# Altium PCB ShutdownBoard.PcbDoc (part 1 of 2)
Units mil, origin at the board's own origin, x right, y up, seen from the top; angles counter-clockwise.
Board outline 4429.13 x 4429.13 mil, 2 copper layers (Top Layer, Bottom Layer), stack 61.8 mil thick; 127 components, 112 nets, 478 pads, 128 vias.
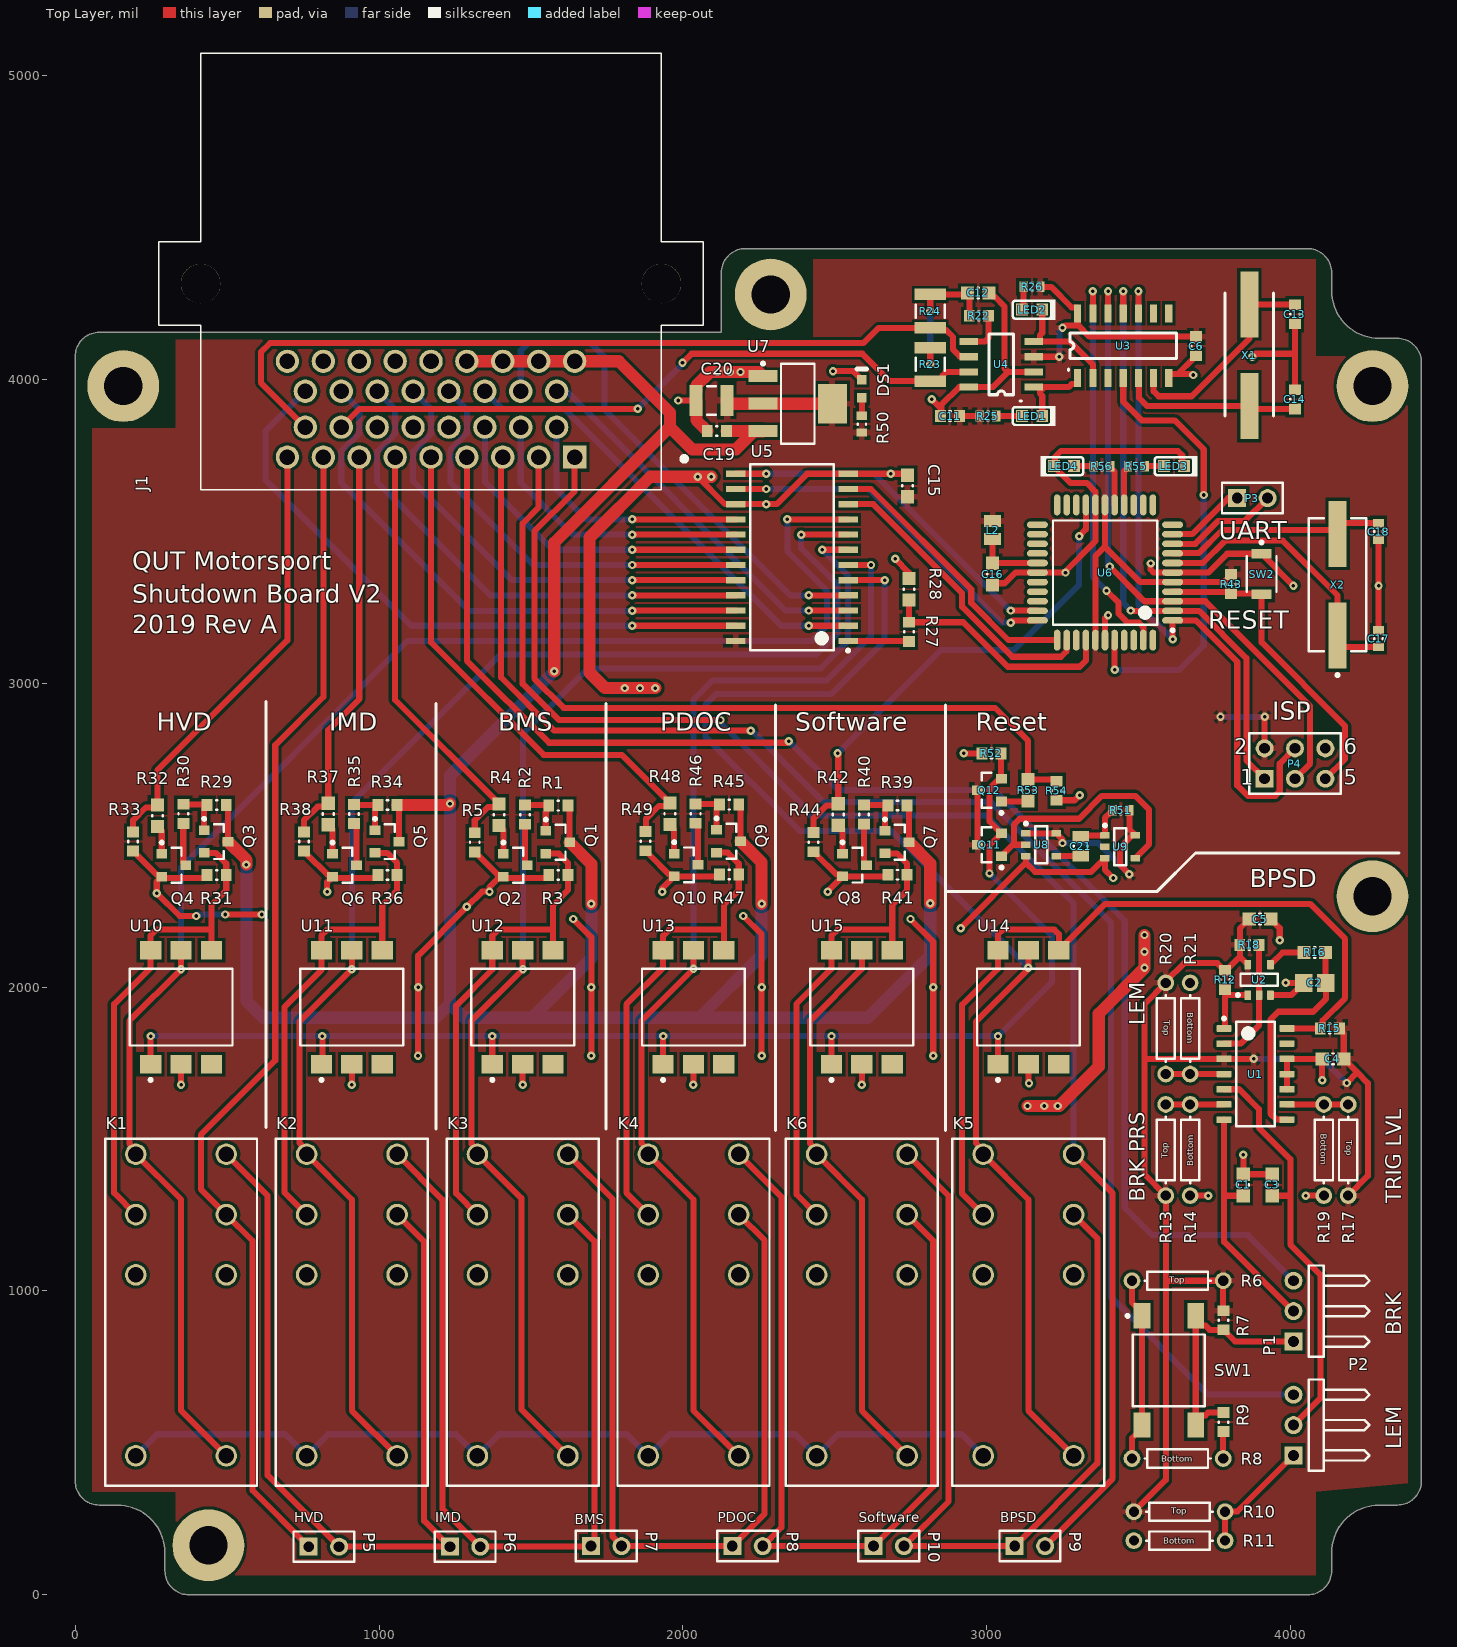
[diagram p0: Top Layer view]
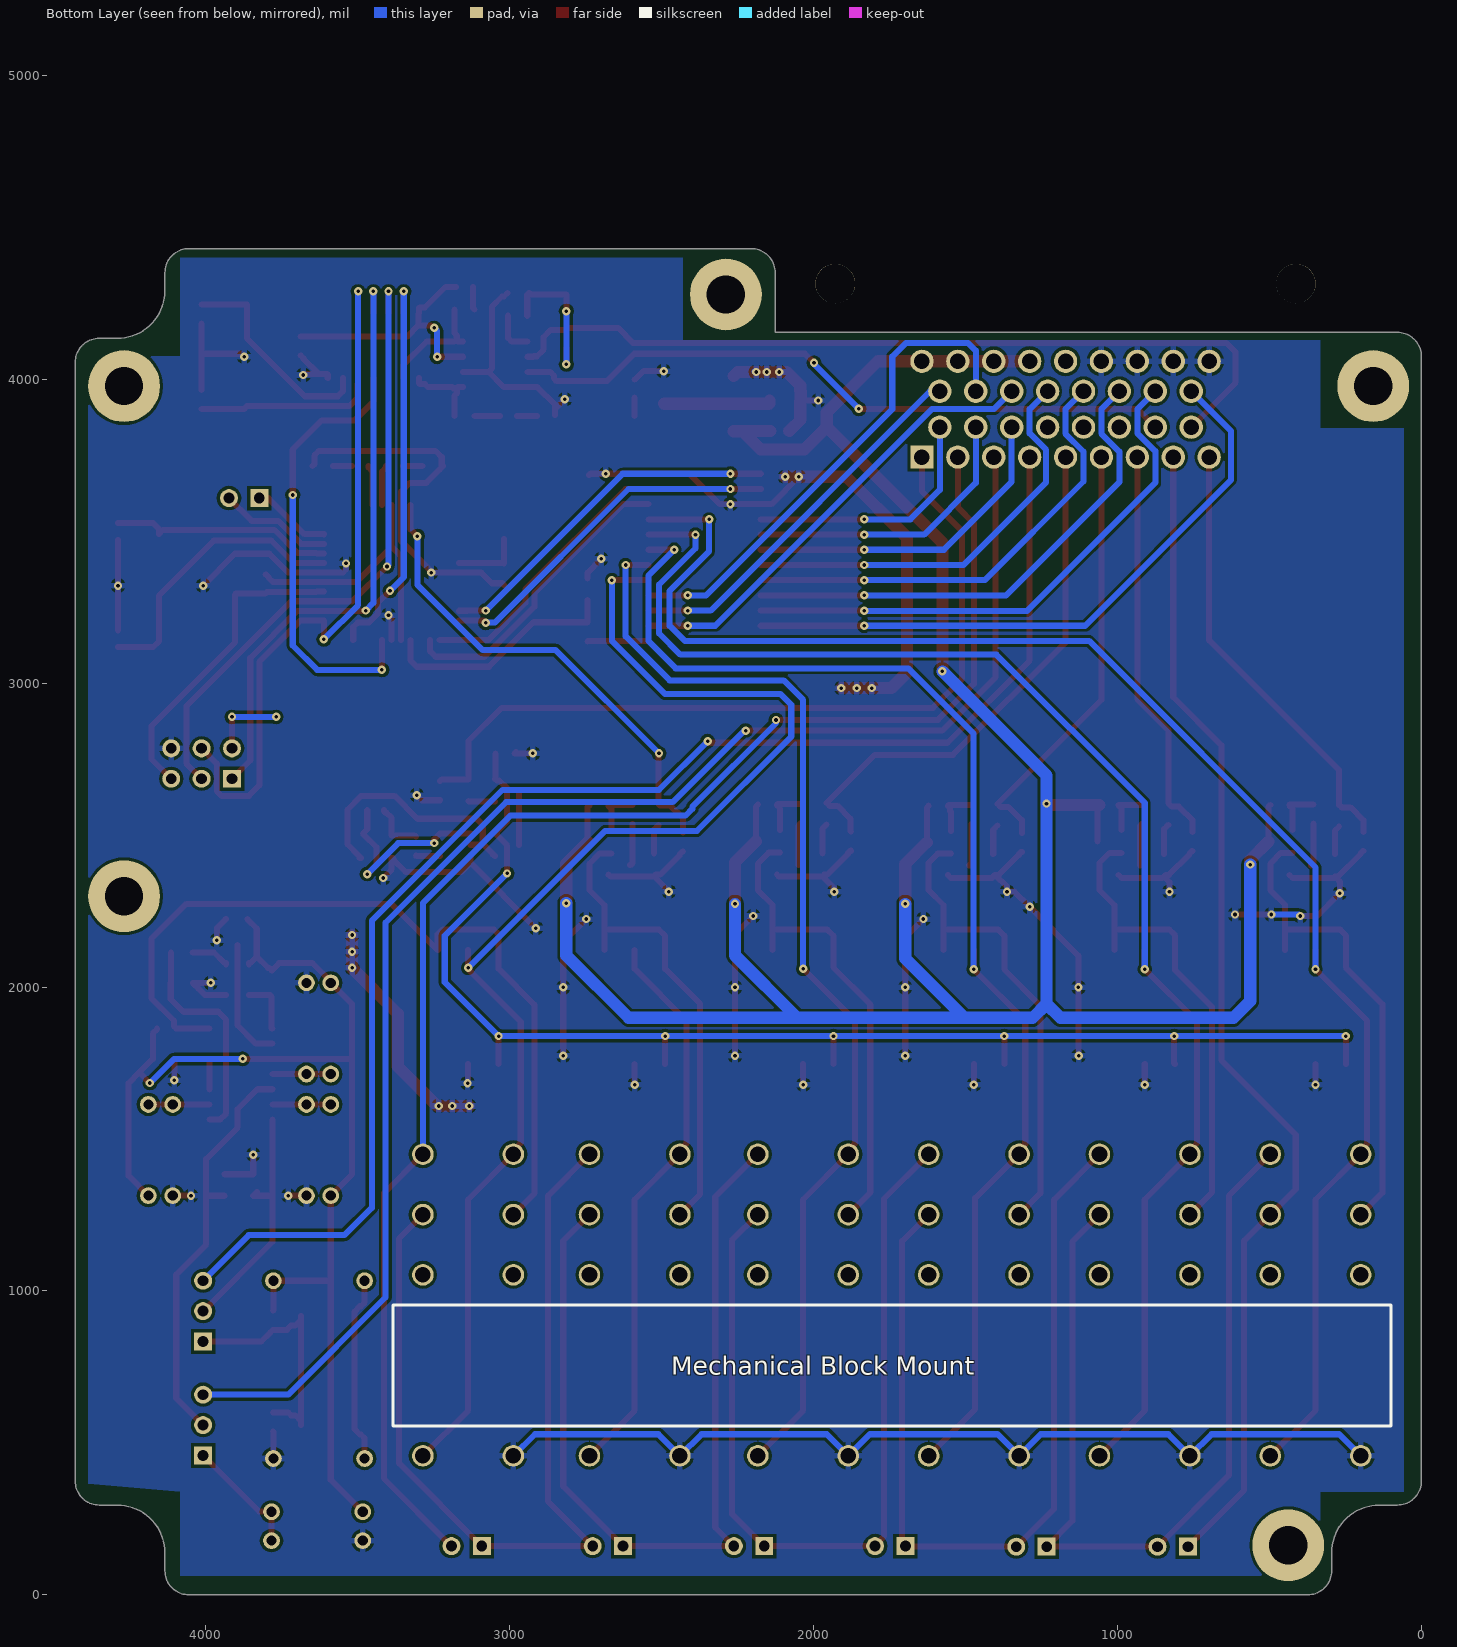
[diagram p1: Bottom Layer view, seen from below]

## Layer stack, top to bottom
Top Solder: solder mask 0.4, Solder Resist, Dk 3.5
Top Layer: signal copper 1.4
Dielectric 1: core 59, Core-043, Dk 4.3
Bottom Layer: signal copper 1.4
Bottom Solder: solder mask 0.4, Solder Resist, Dk 3.5

## Board outline
138.05,295.53 cw(c138.05,138.05) 295.53,138.05 295.53,78.99 ccw(c374.27,78.99) 374.27,0.25 4055.37,0.25 ccw(c4055.37,78.99) 4134.11,78.99 4134.11,138.05 cw(c4291.59,138.05) 4291.59,295.53 4350.64,295.53 ccw(c4350.64,374.27) 4429.38,374.27 4429.38,4055.37 ccw(c4350.64,4055.37) 4350.64,4134.11 4291.59,4134.11 cw(c4291.59,4291.59) 4134.11,4291.59 4134.11,4350.64 ccw(c4055.37,4350.64) 4055.37,4429.38 2204.97,4429.38 ccw(c2204.97,4350.64) 2126.23,4350.64 2126.23,4153.79 78.99,4153.79 ccw(c78.99,4075.05) 0.25,4075.05 0.25,374.27 ccw(c78.99,374.27) 78.99,295.53

## Design rules (kind name [scope] priority, off if disabled: settings)
Clearance [All] p1: gap=10 ignorepadtopadclearanceinfootprint=FALSE except(0: Arc-Hole Track-Hole SMDPad-Hole THPad-Hole Via-Hole Fill-Hole Poly-Hole Region-Hole Text-Hole; 6: Arc-SMDPad Arc-THPad Arc-Via Track-SMDPad Track-THPad Track-Via SMDPad-SMDPad)
PolygonConnect [All] p1: connectstyle=Relief reliefconductorwidth=20 reliefentries=4 polygonreliefangle="90 Angle" airgapwidth=10
RoutingVias [All] p1: holewidth=11.81 width=27.56 viastyle="Through Hole" minholewidth=11.81 minwidth=27.56 maxholewidth=11.81 maxwidth=27.56
SolderMaskExpansion [All] p1: expansion=4
Width [All] p1: maxlimit=40 minlimit=10 preferedwidth=20 minimp=50.000000 maximp=50.000000 favimp=50.000000
30 further rules are at their usual default settings.

## Classes and differential pairs
component class Shutdown: C21 K1 K2 K3 K4 K5 K6 P5 P6 P7 P8 P9 P10 Q11 Q12 R51 R52 R53 R54 U8 U9 U10 U11 U12 U13 U14 U15
component class Power: C19 C20 DS1 R50 U7
component class PDOC_Filtering: Q9 Q10 R45 R46 R47 R48 R49
component class Microcontroller: C16 C17 C18 L2 LED3 LED4 P3 P4 Q7 Q8 R39 R40 R41 R42 R43 R44 R55 R56 SW2 U6 X2
component class IMD_Filtering: Q5 Q6 R34 R35 R36 R37 R38
component class HVD_Filtering: Q3 Q4 R29 R30 R31 R32 R33
component class Demux: C15 R27 R28 U5
component class Connector: J1
component class CANBUS: C6 C11 C12 C13 C14 LED1 LED2 R22 R23 R24 R25 R26 U3 U4 X1
component class BPSD_Simulation: P1 P2 R6 R7 R8 R9 R10 R11 SW1
component class BPSD_Filtering: C1 C2 C3 C4 C5 R12 R13 R14 R15 R16 R17 R18 R19 R20 R21 U1 U2
component class BMS_Filtering: Q1 Q2 R1 R2 R3 R4 R5

## Components (designator, comment, footprint, x,y, rotation, side; value= is the part's Value field where it differs from the comment)
C1 "CAP 100nF 16V 0603(1608)" CAPC0603(1608)100_M 3843.5,1348.6 r270 top value=100nF
C2 "EMK212BJ106KG-T" CAPC2013X135X50ML10T25 4078.5,2013.6 r0 top
C3 "CAP 100nF 16V 0603(1608)" CAPC0603(1608)100_M 3938.5,1348.6 r270 top value=100nF
C4 "CAP 100nF 16V 0603(1608)" CAPC0603(1608)100_M 4138.5,1763.6 r0 top value=100nF
C5 "CAP 100nF 16V 0603(1608)" CAPC0603(1608)100_M 3898.5,2223.6 r0 top value=100nF
C6 "CAP 100nF 16V 0603(1608)" CAPC0603(1608)100_N 3688.5,4108.6 r90 top value=100nF
C11 "CAP 100nF 16V 0603(1608)" CAPC0603(1608)100_N 2878.5,3878.6 r0 top value=100nF
C12 "CAP 4.7nF 50V 0603(1608)" CAPC0603(1608)100_M 2971.45,4283.6 r180 top value=4.7nF
C13 "CAP 22pF 16V 0603(1608)" CAPC0603(1608)100_N 4013.5,4213.6 r90 top value=22pF
C14 "CAP 22pF 16V 0603(1608)" CAPC0603(1608)100_N 4013.5,3933.6 r90 top value=22pF
C15 "CAP 100nF 16V 0603(1608)" CAPC0603(1608)100_M 2738.5,3648.6 r270 top value=100nF
C16 "CAP 100nF 16V 0603(1608)" CAPC0603(1608)100_M 3018.5,3358.6 r90 top value=100nF
C17 "CAP 22pF 16V 0603(1608)" CAPC0603(1608)100_L 4288.5,3146.16 r270 top value=22pF
C18 "CAP 22pF 16V 0603(1608)" CAPC0603(1608)100_L 4288.5,3498.6 r90 top value=22pF
C19 "CAP 100nF 25V 0603(1608)" CAPC0603(1608)100_N 2111.3,3829.23 r0 top value=100nF
C20 "12103D106KAT2A" CAPC3225X279X50LL20T25 2093.5,3929.67 r0 top
C21 "CAP 10uF 16V 0805(2012)" CAPC0805(2012)100_L 3308.5,2463.6 r90 top value=10uF
DS1 "LTST-C191KGKT" LITE-ON-LTST-C191KRKT-2_V 2588.5,3968.6 r90 top
J1 "6437288-2" TE_6437288-2 1170.94,3901.12 r180 top
K1 "RT424024" TECO-RT424024_V 348.5,953.6 r90 top
K2 "RT424024" TECO-RT424024_V 910.5,953.6 r90 top
K3 "RT424024" TECO-RT424024_V 1472.5,953.6 r90 top
K4 "RT424024" TECO-RT424024_V 2034.5,953.6 r90 top
K5 "RT424024" TECO-RT424024_V 3136.5,953.6 r90 top
K6 "RT424024" TECO-RT424024_V 2588.5,953.6 r90 top
L2 "LQM21FN100M70L" MURA-IND0805_L 3018.54,3503.6 r90 top
LED1 "2V 20mA 0603 Org" KING-LED0603-25-ORANGE_V 3148.5,3878.6 r180 top
LED2 "2V 20mA 0603 Org" KING-LED0603-25-ORANGE_V 3148.5,4228.6 r180 top
LED3 "2V 20mA 0603 Org" KING-LED0603-25-ORANGE_V 3615.31,3713.6 r180 top
LED4 "2V 20mA 0603 Org" KING-LED0603-25-ORANGE_V 3253.5,3713.61 r0 top
P1 "Header 3H" HDR1X3H 4008.5,833.6 r90 top
P2 "Header 3H" HDR1X3H 4008.5,458.6 r90 top
P3 "UART Header" HDR1X2 3823.5,3608.6 r0 top
P4 "Header 3X2" HDR2X3 3913.5,2685.2 r0 top
P5 "Header 2" HDR1X2 768.5,158.6 r0 top
P6 "Header 2" HDR1X2 1233.09,158.6 r0 top
P7 "Header 2" HDR1X2 1697.68,160.43 r0 top
P8 "Header 2" HDR1X2 2162.26,160.43 r0 top
P9 "Header 2" HDR1X2 3091.44,160.43 r0 top
P10 "Header 2" HDR1X2 2626.85,160.43 r0 top
Q1 "NTR1P02T1G" ONSC-SOT-23-3-318-08_V 1587.86,2476.01 r0 top
Q2 "MGSF1N02LT1G" ONSC-SOT-23-3-318-08_V 1448.33,2400.49 r0 top
Q3 "NTR1P02T1G" ONSC-SOT-23-3-318-08_V 463.86,2478.6 r0 top
Q4 "MGSF1N02LT1G" ONSC-SOT-23-3-318-08_V 324.33,2400.49 r0 top
Q5 "NTR1P02T1G" ONSC-SOT-23-3-318-08_V 1025.86,2478.6 r0 top
Q6 "MGSF1N02LT1G" ONSC-SOT-23-3-318-08_V 886.33,2400.49 r0 top
Q7 "NTR1P02T1G" ONSC-SOT-23-3-318-08_V 2703.86,2476.79 r0 top
Q8 "MGSF1N02LT1G" ONSC-SOT-23-3-318-08_V 2564.33,2401.28 r0 top
Q9 "NTR1P02T1G" ONSC-SOT-23-3-318-08_V 2149.86,2479.79 r0 top
Q10 "MGSF1N02LT1G" ONSC-SOT-23-3-318-08_V 2010.33,2401.68 r0 top
Q11 "MGSF1N02LT1G" ONSC-SOT-23-3-318-08_V 3008.5,2467.98 r180 top
Q12 "MGSF1N02LT1G" ONSC-SOT-23-3-318-08_V 3008.23,2647.8 r180 top
R1 "10K 5% 0603(1608)" RESC0603(1608)_N 1589.82,2596.44 r0 top value="10000.00 Ohm"
R2 "4K7 5% 0603(1608)" RESC0603(1608)_N 1479.82,2566.91 r90 top value="4700.00 Ohm"
R3 "10K 5% 0603(1608)" RESC0603(1608)_N 1589.82,2368.6 r0 top value="10000.00 Ohm"
R4 "220R 5% 0603(1608)" RESC0603(1608)_M 1394.82,2566.91 r270 top value="220.00 Ohm"
R5 "10K 5% 0603(1608)" RESC0603(1608)_N 1314.82,2476.01 r90 top value="10000.00 Ohm"
R6 "Res1" AXIAL-0.3 3627.28,1033.6 r0 top value=1K
R7 "4K7 5% 0603(1608)" RESC0603(1608)_N 3778.5,903.6 r90 top value="4700.00 Ohm"
R8 "Res1" AXIAL-0.3 3627.28,448.6 r180 top value=1K
R9 "4K7 5% 0603(1608)" RESC0603(1608)_N 3778.5,568.6 r90 top value="4700.00 Ohm"
R10 "Res1" AXIAL-0.3 3633.5,273.6 r180 top value=1K
R11 "Res1" AXIAL-0.3 3633.5,178.6 r0 top value=1K
R12 "4K7 5% 0603(1608)" RESC0603(1608)_N 3783.5,2023.6 r90 top value="4700.00 Ohm"
R13 "Res1" AXIAL-0.3 3588.5,1463.6 r90 top value=1K
R14 "Res1" AXIAL-0.3 3668.5,1463.6 r270 top value=1K
R15 "4K7 5% 0603(1608)" RESC0603(1608)_N 4128.5,1863.6 r0 top value="4700.00 Ohm"
R16 "51K 5% 0603(1608)" RESC0603(1608)_M 4078.5,2113.6 r0 top value="51000.00 Ohm"
R17 "Res1" AXIAL-0.3 4188.5,1463.6 r270 top value=1K
R18 "4K7 5% 0603(1608)" RESC0603(1608)_N 3863.5,2138.6 r180 top value="4700.00 Ohm"
R19 "Res1" AXIAL-0.3 4108.5,1463.6 r90 top value=1K
R20 "Res1" AXIAL-0.3 3588.5,1863.6 r90 top value=1K
R21 "Res1" AXIAL-0.3 3668.5,1863.6 r270 top value=1K
R22 "300R 5% 0603(1608)" RESC0603(1608)_N 2973.5,4208.6 r180 top value="300.00 Ohm"
R23 "60R4 1% 1210(3225)" RESC1210(3225)_L 2813.5,4048.6 r270 top value="60.40 Ohm"
R24 "60R4 1% 1210(3225)" RESC1210(3225)_L 2813.5,4223.6 r270 top value="60.40 Ohm"
R25 "330R 5% 0603(1608)" RESC0603(1608)_L 3003.5,3878.6 r0 top value="330.00 Ohm"
R26 "330R 5% 0603(1608)" RESC0603(1608)_L 3148.5,4303.6 r180 top value="330.00 Ohm"
R27 "4K7 5% 0603(1608)" RESC0603(1608)_N 2743.5,3168.6 r270 top value="4700.00 Ohm"
R28 "3K 5% 0603(1608)" RESC0603(1608)_M 2743.5,3308.6 r270 top value="3000.00 Ohm"
R29 "10K 5% 0603(1608)" RESC0603(1608)_N 465.82,2599.04 r0 top value="10000.00 Ohm"
R30 "4K7 5% 0603(1608)" RESC0603(1608)_N 355.82,2569.51 r90 top value="4700.00 Ohm"
R31 "10K 5% 0603(1608)" RESC0603(1608)_N 465.82,2368.6 r0 top value="10000.00 Ohm"
R32 "220R 5% 0603(1608)" RESC0603(1608)_M 270.82,2563.6 r270 top value="220.00 Ohm"
R33 "10K 5% 0603(1608)" RESC0603(1608)_N 190.82,2478.6 r90 top value="10000.00 Ohm"
R34 "10K 5% 0603(1608)" RESC0603(1608)_N 1027.82,2598.6 r0 top value="10000.00 Ohm"
R35 "4K7 5% 0603(1608)" RESC0603(1608)_N 917.82,2569.08 r90 top value="4700.00 Ohm"
R36 "10K 5% 0603(1608)" RESC0603(1608)_N 1027.82,2368.6 r0 top value="10000.00 Ohm"
R37 "220R 5% 0603(1608)" RESC0603(1608)_M 832.82,2569.08 r270 top value="220.00 Ohm"
R38 "10K 5% 0603(1608)" RESC0603(1608)_N 752.82,2478.6 r90 top value="10000.00 Ohm"
R39 "10K 5% 0603(1608)" RESC0603(1608)_N 2705.82,2597.23 r0 top value="10000.00 Ohm"
R40 "4K7 5% 0603(1608)" RESC0603(1608)_N 2595.82,2567.7 r90 top value="4700.00 Ohm"
R41 "10K 5% 0603(1608)" RESC0603(1608)_N 2705.82,2369.39 r0 top value="10000.00 Ohm"
R42 "220R 5% 0603(1608)" RESC0603(1608)_M 2510.82,2567.7 r270 top value="220.00 Ohm"
R43 "10K 5% 0603(1608)" RESC0603(1608)_N 3803.5,3325.61 r90 top value="10000.00 Ohm"
R44 "10K 5% 0603(1608)" RESC0603(1608)_N 2429.49,2476.79 r90 top value="10000.00 Ohm"
R45 "10K 5% 0603(1608)" RESC0603(1608)_N 2151.82,2599.79 r0 top value="10000.00 Ohm"
R46 "4K7 5% 0603(1608)" RESC0603(1608)_N 2041.82,2570.26 r90 top value="4700.00 Ohm"
R47 "10K 5% 0603(1608)" RESC0603(1608)_N 2151.82,2369.79 r0 top value="10000.00 Ohm"
R48 "220R 5% 0603(1608)" RESC0603(1608)_M 1956.82,2570.26 r270 top value="220.00 Ohm"
R49 "10K 5% 0603(1608)" RESC0603(1608)_N 1876.82,2479.79 r90 top value="10000.00 Ohm"
R50 "330R 5% 0603(1608)" RESC0603(1608)_L 2588.5,3852.07 r90 top value="330.00 Ohm"
R51 "1K 5% 0603(1608)" RESC0603(1608)_L 3440.94,2581.48 r0 top value="1000.00 Ohm"
R52 "4K7 5% 0603(1608)" RESC0603(1608)_N 3015,2768.6 r0 top value="4700.00 Ohm"
R53 "220R 5% 0603(1608)" RESC0603(1608)_M 3135.36,2647.8 r270 top value="220.00 Ohm"
R54 "10K 5% 0603(1608)" RESC0603(1608)_N 3229.14,2645.83 r90 top value="10000.00 Ohm"
R55 "330R 5% 0603(1608)" RESC0603(1608)_L 3491.81,3713.61 r0 top value="330.00 Ohm"
R56 "330R 5% 0603(1608)" RESC0603(1608)_L 3378.5,3713.6 r180 top value="330.00 Ohm"
SW1 "4-1437565-1" TECO-4-1437565-1_V 3598.5,738.6 r0 top
SW2 "B3U-1000P" OMRON-B3U-1000_V 3903.5,3358.6 r270 top
U1 "LM339D" D0014A_L 3883.5,1713.6 r0 top
U2 "SN74AHC1G02DBVR" DBV0005A_L 3895.47,2023.6 r90 top
U3 "MCP2517FD" "MCP2517FD SOIC" 3298.5,4003.6 r90 top
U4 "MCP2561" "MCP2561 SOIC" 3153.5,3973.6 r180 top
U5 "MC14067BDWR2G" ONSC-SOIC-24-751E-04_V 2358.5,3413.6 r180 top
U6 "ATmega1284P-AU" 44A_N 3388.5,3363.6 r180 top
U7 "LD1117S50CTR" SOT-223_N 2377.52,3919.23 r0 top
U8 "SN74AHC1G02DBVR" DBV0005A_L 3178.5,2467.98 r0 top
U9 "SN74AHC1G02DBVR" DBV0005A_L 3438.5,2461.64 r0 top
U10 "VO14642AABTR" VISH-VO14642AABTR_V 348.5,1933.6 r90 top
U11 "VO14642AABTR" VISH-VO14642AABTR_V 910.5,1933.6 r90 top
U12 "VO14642AABTR" VISH-VO14642AABTR_V 1472.5,1933.6 r90 top
U13 "VO14642AABTR" VISH-VO14642AABTR_V 2034.5,1933.6 r90 top
U14 "VO14642AABTR" VISH-VO14642AABTR_V 3136.5,1933.6 r90 top
U15 "VO14642AABTR" VISH-VO14642AABTR_V 2588.5,1933.6 r90 top
X1 "Crystal 20MHz" "Crystal 20MHz" 3863.5,4078.6 r270 top
X2 "ATS16ASM-1" CTS-ATS-SM-XTAL-2 4153.5,3323.6 r90 top

## Footprints (in the part's own frame and the unit in brackets; to place one, negate y for a bottom-side part, rotate by r counter-clockwise, add the part's x,y. Pads: shape width x height; smd on the part's side, far side on the other; paste and mask are expansions set on the pad)
44A_N [mm] "Thin QFP, 44-Leads, Body 10x10mm, Pitch 0.8mm, IPC Medium Density"
  oval 1.75x0.55 smd: 1(-5.65,4) 2(-5.65,3.2) 3(-5.65,2.4) 4(-5.65,1.6) 5(-5.65,0.8) 6(-5.65,0) 7(-5.65,-0.8) 8(-5.65,-1.6) 9(-5.65,-2.4) 10(-5.65,-3.2) 11(-5.65,-4) 23(5.65,-4) 24(5.65,-3.2) 25(5.65,-2.4) 26(5.65,-1.6) 27(5.65,-0.8) 28(5.65,0) 29(5.65,0.8) 30(5.65,1.6) 31(5.65,2.4) 32(5.65,3.2) 33(5.65,4)
  oval 0.55x1.75 smd: 12(-4,-5.65) 13(-3.2,-5.65) 14(-2.4,-5.65) 15(-1.6,-5.65) 16(-0.8,-5.65) 17(0,-5.65) 18(0.8,-5.65) 19(1.6,-5.65) 20(2.4,-5.65) 21(3.2,-5.65) 22(4,-5.65) 34(4,5.65) 35(3.2,5.65) 36(2.4,5.65) 37(1.6,5.65) 38(0.8,5.65) 39(0,5.65) 40(-0.8,5.65) 41(-1.6,5.65) 42(-2.4,5.65) 43(-3.2,5.65) 44(-4,5.65)
  silkscreen extent -5.77,-4.35 4.35,4.95, body extent -5,-5 5,5, height 1.2
AXIAL-0.3 [mm] "Axial Device, Thru-Hole; 2 Leads; 0.3 in Pin Spacing"
  round 1.4 hole 0.85: 1(-3.81,0) 2(3.81,0)
  silkscreen extent -2.77,-0.76 2.77,0.76
CAPC0603(1608)100_L [mm] "Chip Capacitor, Body 1.6x0.8mm, Height 1.0mm, IPC High Density"
  rect 0.7x0.9 smd: 1(-0.7,0) 2(0.7,0)
  silkscreen extent -0.05,-0.35 0.05,0.35, body extent -0.87,-0.47 0.88,0.48, height 1
CAPC0603(1608)100_M [mm] "Chip Capacitor, Body 1.6x0.8mm, Height 1.0mm, IPC Low Density"
  rect 1.1x1.1 smd: 1(-0.9,0) 2(0.9,0)
  silkscreen extent -0.05,-0.45 0.05,0.45, body extent -0.87,-0.47 0.88,0.48, height 1
CAPC0603(1608)100_N [mm] "Chip Capacitor, Body 1.6x0.8mm, Height 1.0mm, IPC Medium Density"
  rect 0.9x1 smd: 1(-0.8,0) 2(0.8,0)
  silkscreen extent -0.05,-0.4 0.05,0.4, body extent -0.87,-0.48 0.88,0.47, height 1
CAPC0805(2012)100_L [mm] "Chip Capacitor, Body 2.0x1.2mm, Height 1.0mm, IPC High Density"
  rect 0.95x1.35 smd: 1(-0.8,0) 2(0.8,0)
  silkscreen extent -0.05,-0.58 0.05,0.58, body extent -1.1,-0.72 1.1,0.72, height 1
CAPC2013X135X50ML10T25 [mm] "Chip Capacitor, 2-Leads, Body 2.10x1.35mm, IPC Low Density"
  rect 1.45x1.5 smd: 1(-0.925,0) 2(0.925,0)
  body extent -1.05,-0.67 1.05,0.67, height 1.35
CAPC3225X279X50LL20T25 [mm] "Chip Capacitor, 2-Leads, Body 3.40x2.70mm, IPC High Density"
  rect 1.1x2.6 smd: 1(-1.3,0) 2(1.3,0)
  silkscreen extent -0.35,-1.2 0.35,1.2, body extent -1.7,-1.35 1.7,1.35, height 2.79
"Crystal 20MHz" [mm]
  rect 5.5x1.5 smd: 1(-4.25,0) 2(4.25,0)
  silkscreen extent -5.21,-2.03 5.08,2.03, body extent -5.29,-1.91 5.21,1.9, height 4.3
CTS-ATS-SM-XTAL-2 [mm] "SMD, 2-Leads, Body 11.1x4.83mm, Pitch 8.5mm"
  rect 5.5x1.5 smd: 1(-4.25,0) 2(4.25,0)
  silkscreen extent -7.67,-2.41 5.55,2.41, body extent -5.59,-2.42 5.59,2.42, height 4.3
D0014A_L [mm] "SOIC, 14-Leads, Body 8.75x4mm, Pitch 1.27mm, IPC High Density"
  rrect18% 1.25x0.55 smd: 1(-2.625,3.81) 2(-2.625,2.54) 3(-2.625,1.27) 4(-2.625,0) 5(-2.625,-1.27) 6(-2.625,-2.54) 7(-2.625,-3.81) 8(2.625,-3.81) 9(2.625,-2.54) 10(2.625,-1.27) 11(2.625,0) 12(2.625,1.27) 13(2.625,2.54) 14(2.625,3.81)
  silkscreen extent -2.75,-4.37 1.6,4.76, body extent -3.02,-4.32 3.02,4.32, height 1.59
DBV0005A_L [mm] "SOT23, 5-Leads, Body 3.05x1.75mm, Pitch 0.95mm, IPC High Density"
  rrect18% 0.8x0.55 smd: 1(-1.275,0.95) 2(-1.275,0) 3(-1.275,-0.95) 4(1.275,-0.95) 5(1.275,0.95)
  silkscreen extent -1.4,-1.55 0.5,1.9, body extent -1.42,-1.46 1.42,1.46, height 1.08
HDR1X2 [mm] "Connector; Header; 2 Position"
  rect 1.5x1.5 hole 0.9: 1(0,0)
  round 1.5 hole 0.9: 2(2.54,0)
  silkscreen extent -1.27,-1.27 3.81,1.27
HDR1X3H [mm] "Connector; Header; 3 Position; Right Angle"
  rect 1.5x1.5 hole 0.9: 1(0,0)
  round 1.5 hole 0.9: 2(2.54,0) 3(5.08,0)
  silkscreen extent -1.27,-6.35 6.35,-1.27
HDR2X3 [mm] "Connector; Header; 3x2 Position"
  rect 1.5x1.5 hole 0.9: 1(0,0)
  round 1.5 hole 0.9: 2(0,2.54) 3(2.54,0) 4(2.54,2.54) 5(5.08,0) 6(5.08,2.54)
  silkscreen extent -1.27,-1.27 6.35,3.81
KING-LED0603-25-ORANGE_V [mm] "LED, SMT, Body 1.6 x 0.8 mm, 0.25mm Thickness"
  rect 1x1 smd paste+0 mask+0: 1(0.85,0) 2(-0.85,0)
  silkscreen extent -1.97,-0.85 1.6,0.85, body extent -0.8,-0.4 0.8,0.4, height 0.25
LITE-ON-LTST-C191KRKT-2_V [mm] "Chip, 2-Leads, Body 1.6x0.8mm"
  rect 0.8x0.8 smd: 1(-0.75,0) 2(0.75,0)
  silkscreen extent 1.65,-0.4 1.65,0.4, body extent -0.8,-0.4 0.8,0.4, height 0.55
"MCP2517FD SOIC" [mm]
  rect 1.5x0.6 smd: 1(0,0) 2(0,-1.27) 3(0,-2.54) 4(0,-3.81) 5(0,-5.08) 6(0,-6.35) 7(0,-7.62) 8(5.4,-7.62) 9(5.4,-6.35) 10(5.4,-5.08) 11(5.4,-3.81) 12(5.4,-2.54) 13(5.4,-1.27) 14(5.4,0)
  silkscreen extent 0.63,-8.25 3.76,0.76, body extent 0.74,-8.13 4.64,0.52, height 1.74
"MCP2561 SOIC" [mm]
  rect 1.55x0.6 smd: 1(0,0) 2(0,-1.27) 3(0,-2.54) 4(0,-3.81) 5(5.4,-3.81) 6(5.4,-2.54) 7(5.4,-1.27) 8(5.4,0)
  silkscreen extent 1.02,-4.44 3.74,1.14, body extent 0.51,-4.38 4.64,0.52, height 1.65
MURA-IND0805_L [mm] "Chip Inductor, 2-Leads, Body 2.2x1.45mm, IPC High Density"
  rect 0.99x1.39 smd: 1(-0.755,0) 2(0.755,0)
  body extent -1.1,-0.72 1.1,0.72, height 1.45
OMRON-B3U-1000_V [mm] "SMD, 2-Leads, Body 3x2.5mm"
  rect 0.8x1.7 smd: 1(-1.7,0) 2(1.7,0)
  silkscreen extent -2.77,-1.25 1.5,1.25, body extent -1.5,-1.25 1.5,1.25, height 1.75
ONSC-SOIC-24-751E-04_V [mm] "SOIC, 24-Leads, Body 15.54x7.6mm, Pitch 1.27mm"
  rect 1.62x0.52 smd: 1(-4.69,6.985) 2(-4.69,5.715) 3(-4.69,4.445) 4(-4.69,3.175) 5(-4.69,1.905) 6(-4.69,0.635) 7(-4.69,-0.635) 8(-4.69,-1.905) 9(-4.69,-3.175) 10(-4.69,-4.445) 11(-4.69,-5.715) 12(-4.69,-6.985) 13(4.69,-6.985) 14(4.69,-5.715) 15(4.69,-4.445) 16(4.69,-3.175) 17(4.69,-1.905) 18(4.69,-0.635) 19(4.69,0.635) 20(4.69,1.905) 21(4.69,3.175) 22(4.69,4.445) 23(4.69,5.715) 24(4.69,6.985)
  silkscreen extent -4.82,-7.77 3.48,7.92, body extent -3.8,-7.77 3.8,7.77, height 2.65
ONSC-SOT-23-3-318-08_V [mm] "SOT23, 3-Leads, Body 2.92x1.3mm, Pitch 0.95mm"
  rect 0.9x0.8 smd: 1(-1,0.95) 2(-1,-0.95) 3(1,0)
  silkscreen extent -1.12,-1.46 0.65,2.02, body extent -0.65,-1.46 0.65,1.46, height 1.11
RESC0603(1608)_L [mm] "Chip Resistor, Body 1.6x0.8mm, IPC High Density"
  rect 0.7x0.9 smd: 1(-0.7,0) 2(0.7,0)
  silkscreen extent -0.05,-0.35 0.05,0.35, body extent -0.85,-0.47 0.85,0.47, height 0.6
RESC0603(1608)_M [mm] "Chip Resistor, Body 1.6x0.8mm, IPC Low Density"
  rect 1.1x1.1 smd: 1(-0.9,0) 2(0.9,0)
  silkscreen extent -0.05,-0.45 0.05,0.45, body extent -0.85,-0.47 0.85,0.47, height 0.6
RESC0603(1608)_N [mm] "Chip Resistor, Body 1.6x0.8mm, IPC Medium Density"
  rect 0.9x1 smd: 1(-0.8,0) 2(0.8,0)
  silkscreen extent -0.05,-0.4 0.05,0.4, body extent -0.85,-0.47 0.85,0.47, height 0.6
RESC1210(3225)_L [mm] "Chip Resistor, Body 3.2x2.5mm, IPC High Density"
  rect 0.95x2.6 smd: 1(-1.4,0) 2(1.4,0)
  silkscreen extent -0.55,-1.2 0.55,1.2, body extent -1.7,-1.35 1.7,1.35, height 0.71
SOT-223_N [mm] "SOT223, 4-Leads, Body 6.5x3.5mm, Pitch 2.3mm, Lead Span 7mm, IPC Medium Density"
  rect 2.4x1 smd: 1(-2.9,2.3) 2(-2.9,0) 3(-2.9,-2.3)
  rect 2.4x3.3 smd: 4(2.9,0)
  silkscreen extent -3.02,-3.35 1.4,3.47, body extent -1.85,-3.35 1.85,3.35, height 1.8
TE_6437288-2 [mm]
  rect 1.95x1.95 hole 1.3: 1(-12,4)
  round 1.95 hole 1.3: 2(-9,4) 3(-6,4) 4(-3,4) 5(0,4) 6(3,4) 7(6,4) 8(9,4) 9(12,4) 10(-10.5,1.5) 11(-7.5,1.5) 12(-4.5,1.5) 13(-1.5,1.5) 14(1.5,1.5) 15(4.5,1.5) 16(7.5,1.5) 17(10.5,1.5) 18(-10.5,-1.5) 19(-7.5,-1.5) 20(-4.5,-1.5) 21(-1.5,-1.5) 22(1.5,-1.5) 23(4.5,-1.5) 24(7.5,-1.5) 25(10.5,-1.5) 26(-12,-4) 27(-9,-4) 28(-6,-4) 29(-3,-4) 30(0,-4) 31(3,-4) 32(6,-4) 33(9,-4) 34(12,-4)
  round 3.3 hole 3.3 unplated: None(-19.25,-10.5) None(19.25,-10.5)
  silkscreen extent -22.75,-29.75 22.75,6.75, body extent -22.75,-29.97 22.75,6.53, height 24.62
TECO-4-1437565-1_V [mil] "SMD, 4-Leads, Body 6x6mm, Pitch 9.1mm"
  rect 55x83 smd: 1(-88.5,179.5) 2(-88.5,-179.5) 3(88.5,179.5) 4(88.5,-179.5)
  silkscreen extent -141,-118 118,184, body extent -118,-197 118,197, height 200
TECO-RT424024_V [mm] "Relay, 8-Leads, Body 29x12.7mm, Height 15.7mm"
  round 1.8 hole 1.3: 11(7.56,-3.78) 12(2.52,-3.78) 14(12.6,-3.78) 21(7.56,3.78) 22(2.52,3.78) 24(12.6,3.78) A(-12.6,-3.78) B(-12.6,3.78)
  silkscreen extent -15.09,-6.35 13.91,6.35, body extent -15.09,-6.35 13.91,6.35, height 15.7
VISH-VO14642AABTR_V [mm] "SMD, 6-Leads, Body 8.6x6.4mm, Pitch 2.54mm"
  rect 1.52x1.78 smd: 1(-4.765,2.54) 2(-4.765,0) 3(-4.765,-2.54) 4(4.765,-2.54) 5(4.765,0) 6(4.765,2.54)
  silkscreen extent -6.2,-4.3 3.2,4.3, body extent -5.15,-4.3 5.15,4.3, height 4.36

## Part data
C1 C3 C4 C5 C15 C16: library part CMP-1035-02583-1, "CAP 100nF 16V ±5% 0603 (1608 Metric) Thickness 1mm SMD", Case-EIA=0603, Case-Metric=1608, Rated Voltage="16 V", Tolerance=±5%, Max Thickness="1 mm", Technology=SMT
C2: library part CMP-2000-05449-1, "Chip Capacitor, 10 uF, +/- 10%, 16 V, -25 to 85 degC, 0805 (2012 Metric), RoHS, Tape and Reel", Capacitance=10µF, Manufacturer="Taiyo Yuden", Operating Temperature=-55degC~85degC, Package / Case=0805(2012Metric), Package Description="2-Pin Surface Mount Device, Body 2 x 1.25 mm", Package Reference=805, PCN Part Number=X5R,X7RDielectrics23/Jan/2008, Ratings=-, Standard Package=1, Temperature Coefficient=X5R, Tolerance=±10%, Voltage - Rated=16V, Applications=GeneralPurpose, Catalog Drawings=xMKSeries_0805_1.25, Category=Capacitors, Datasheet URL=https://datasheet.ciiva.com/26871/getdatasheetpartid-638258-26871376.pdf, Datasheet Version=Sep-12, Family=CeramicCapacitors, Features=-, Height - Seated (Max)=-, Kits=587-1797-KIT-ND-KITCAPCERHICAP0603&0805S, Lead Spacing=-, Lead Style=-, Manufacturer URL=http://www.t-yuden.com/, Mounting Type=SurfaceMount,MLCC, Online Catalog=MSeries, Other Names=587-1295-1, Packaging=CutTape(CT), Series=M, Size / Dimension="0.079\"Lx0.049\"W(2.00mmx1.25mm)", Thickness (Max)="0.053\"(1.35mm)"
C6 C11: library part CMP-1035-02584-1, "CAP 100nF 16V ±10% 0603 (1608 Metric) Thickness 1mm SMD", Case-EIA=0603, Case-Metric=1608, Rated Voltage="16 V", Tolerance=±10%, Max Thickness="1 mm", Technology=SMT
C12: library part CMP-1035-02202-1, "CAP 4.7nF 50V ±5% 0603 (1608 Metric) Thickness 1mm SMD", Case-EIA=0603, Case-Metric=1608, Rated Voltage="50 V", Tolerance=±5%, Max Thickness="1 mm", Technology=SMT
C13 C14: library part CMP-1035-00808-1, "CAP 22pF 16V ±5% 0603 (1608 Metric) Thickness 1mm SMD", Case-EIA=0603, Case-Metric=1608, Rated Voltage="16 V", Tolerance=±5%, Max Thickness="1 mm", Technology=SMT
C17 C18: library part CMP-1035-00806-1, "CAP 22pF 16V ±1% 0603 (1608 Metric) Thickness 1mm SMD", Case-EIA=0603, Case-Metric=1608, Rated Voltage="16 V", Tolerance=±1%, Max Thickness="1 mm", Technology=SMT
C19: library part CMP-1035-02587-1, "CAP 100nF 25V ±5% 0603 (1608 Metric) Thickness 1mm SMD", Case-EIA=0603, Case-Metric=1608, Rated Voltage="25 V", Tolerance=±5%, Max Thickness="1 mm", Technology=SMT
C20: library part CMP-2000-05477-1, "Chip Capacitor, 10 uF, +/- 10%, 25 V, -55 to 85 degC, 1210 (3225 Metric), RoHS, Tape and Reel", Capacitance=10µF, Manufacturer=AVX, Operating Temperature=-55°C~85°C, Package / Case=1210(3225Metric), Package Description="2-Pin Surface Mount Device, Body 3.2 x 2.5 mm", Package Reference=1210, Ratings=-, Standard Package=1, Temperature Coefficient=X5R, Tolerance=±10%, Voltage - Rated=25V, Applications=GeneralPurpose, Catalog Drawings=AT2A_1210_2.79, Category=Capacitors, Datasheet URL=http://datasheets.avx.com/cx5r.pdf, Datasheet Version=05/2016, Family=CeramicCapacitors, Features=-, Height - Seated (Max)=-, Lead Spacing=-, Lead Style=-, Manufacturer URL=http://www.avx.com/, Mounting Technology=SurfaceMount, Mounting Type=SurfaceMount,MLCC, Online Catalog=X5RDielectric(D), Other Names=478-1627-6, Packaging=Digi-Reel®, Product Training Modules=ComponentSolutionsforSmartMeterApplications, Series=-, Size / Dimension="0.126\"Lx0.098\"W(3.20mmx2.50mm)", Thickness (Max)="0.110\"(2.79mm)"
C21: library part CMP-1036-04928-1, "CAP 10uF 16V ±10% 0805 (2012 Metric) Thickness 1mm SMD", Case-EIA=0805, Case-Metric=2012, Rated Voltage="16 V", Tolerance=±10%, Max Thickness="1 mm", Technology=SMT
DS1: library part CMP-2000-05198-1, "Chip LED, Green, 574 nm, 40 pF, -55 to 85 degC, 2-Pin SMD, RoHS, Tape and Reel", Emitting Color=YellowGreen, Forward Current=30mA, Forward Voltage=2.4V, Manufacturer=Lite-On, Operating Temperature Classification=Industrial, Operating Temp Range=-55Cto85C, Package Type=ChipLed, Power Dissipation=75W, Reverse Voltage=5V, Test Current (It)=20mA, Chip Material=AlGaInP, Datasheet URL=http://download.siliconexpert.com/pdfs/2007/08/26/semi_b/manual/lot/ds/ltst-c191kgkt.pdf, Datasheet Version=Jan-07, DELETED=Compliant, Dominant Wave Length=571nm, High Brightness=Yes, Lens Dimensions=1.1X0.8X0.37mm, Luminous Intensity=35mcd, Lum Intensity=35mcd, Main Category=ChipLED, Manufacturer URL=http://www.us.liteon.com/, Mounting=SurfaceMount, Number of Elements=1, Packaging=TapeandReel, Peak Wavelength=574nm, Pin Count=2, Product Depth (mm)=0.8mm, Product Height (mm)=0.55mm, Product Length (mm)=1.6mm, Rad Hardened=No, Shape Type=Rectangular, Type=Uni-Color, Viewing Angle=130deg
J1: "Conn Wire to Board RCP 34 POS 1.5mm Solder RA Thru-Hole Automotive Tube", Package=None, Digi-Key_Part_Number=A142477-ND, Digi-Key_Purchase_URL=https://www.digikey.com/product-detail/en/te-connectivity-amp-connectors/6437288-2/A142477-ND/5428602?utm_source=snapeda&utm_medium=aggregator&utm_campaign=symbol, EU_RoHS_Compliance=Compliant, MF="TE Connectivity", MP=6437288-2, SnapEDA_Link=https://www.snapeda.com/parts/6437288-2/TE%20Connectivity%20AMP%20Connectors/view-part/?ref=snap, TE_purchase_URL=https://www.te.com/usa-en/product-6437288-2.html?te_bu=Cor&te_type=disp&te_campaign=seda_glo_cor-seda-global-disp-prtnr-fy19-seda-model-bom-cta_sma-317_1&elqCampaignId=32493
K1 K2 K3 K4 K5 K6: library part CMP-2000-06999-1, "DPDT 2 Form C (CO) Low Power PCB Relay, 24 VDC, 8 A, -40 to 85 degC, 8-Pin THD, RoHS, Tube", Coil Current=16.7mA, Coil Resistance=1440Ohms, Coil Voltage=24V, Contact Current Rating=8A, Manufacturer="TE Connectivity", Package Description="8-Pin Through Hole Device, Body 29 x 12.7 mm, Height 15.7 mm", Contact Form=2FormC(DPDT-BM), Contact Material=SilverNickel, Datasheet URL=http://www.te.com/commerce/DocumentDelivery/DDEController?Action=showdoc&DocId=Data+Sheet%7FRT2%7F1014%7Fpdf%7FEnglish%7FENG_DS_RT2_1014.pdf%7F6-1393243-8, Datasheet Version=10/2014, Manufacturer URL=http://www.te.com/, Mounting Style=ThroughHole, Mounting Technology=ThroughHole, Package Reference=RT424024
L2: library part CMP-2000-06587-1, "Fixed Inductor, 10 uH, +/-20%, -55 to 125 degC, 2-Pin SMD (0805), RoHS, Tape and Reel", Case Size/Dimension=0805, DC Resistance=0.6, Inductance-Nom=10H, Manufacturer=Murata, Package Description="2-Pin Surface Mount Device, Body 2 x 1.25 mm", Package Reference=IND0805, Rated Current-Max=100mA, Tolerance (%)=20%, Datasheet URL=http://psearch.en.murata.com/inductor/product/LQM21FN100M70%23.pdf, Datasheet Version=05/2016, Manufacturer URL=http://www.murata.com/, Mounting Technology=SurfaceMount
LED1 LED2 LED3 LED4: library part CMP-0239-00002-1, "LED, SMT, 0603(1608), 0.25mm Tthickness, Super Bright Orange", Forward Current="30 mA", PartNumber=APG1608SEKC/T, Power Dissipation="75 mW", Reverse Voltage="5 V", Storage Temperature="-40 to 85 degC", ComponentLink1Description="Manufacturer URL", ComponentLink1URL=http://www.kingbrightusa.com/, ComponentLink2Description=Datasheet, ComponentLink2URL=http://www.kingbrightusa.com/images/catalog/SPEC/APG1608SEKC-T.pdf, DatasheetVersion="Rev. 4A, 12/2011", Mounting Technology="Surface Mount", PackageDescription="2-Pin SMT LED, 1.6 x 0.8 mm Body, 0.25mm Thickness", PackageReference=LED0603-25-ORANGE, PackageVersion="Rev. 4A, 12/2011", Packing=Reel
P1 P2: "Header, 3-Pin, Right Angle", LatestRevisionDate=17-Jul-2002, LatestRevisionNote="Re-released for DXP Platform.", Publisher="Altium Limited"
P3: library part "Header 2", LatestRevisionDate=17-Jul-2002, LatestRevisionNote="Re-released for DXP Platform.", Publisher="Altium Limited"
P4: "Header, 3-Pin, Dual row", LatestRevisionDate=17-Jul-2002, LatestRevisionNote="Re-released for DXP Platform.", Publisher="Altium Limited"
P5 P6 P7 P8 P9 P10: "Header, 2-Pin", LatestRevisionDate=17-Jul-2002, LatestRevisionNote="Re-released for DXP Platform.", Publisher="Altium Limited"
Q1 Q3 Q5 Q7 Q9: library part CMP-1058-00751-1, "Power MOSFET, -20 V, -1 A, P-Channel, 3-Pin SOT-23, Pb-Free, Tape and Reel", Manufacturer="On Semiconductor", Package Type=SOT-23-3, Channel Polarity="P Channel", Ciss Typ (pF)=165, ComponentLink1Description="Manufacturer URL", ComponentLink1URL=http://www.onsemi.com/, ComponentLink2Description=Datasheet, ComponentLink2URL=http://www.onsemi.cn/pub_link/Collateral/NTR1P02T1-D.PDF, ComponentLink3Description="Package Specification", ComponentLink3URL=http://www.onsemi.cn/pub_link/Collateral/318-08.PDF, Configuration=Single, Coss Typ (pF)=110, Crss Typ (pF)=35, DatasheetVersion="Rev. 7", ID Max (A)=1, Mounting Technology="Surface Mount", PackageDescription="3-Pin Small Outline Transistor, Body 2.92 x 1.3 mm, Pitch 0.95 mm", PackageReference=SOT-23-3-318-08, PackageVersion="Rev. AP, 11/2009", Packing="Tape and Reel", PartNumber=NTR1P02T1G, PD Max (W)=0.4, Qrr Typ (nC)=8, RoHS=Pb-Free, V(BR)DSS Min (V)=20, VGS(th) Max (V)=2.3, VGS Max (V)=20
Q2 Q4 Q6 Q8 Q10 Q11 Q12: library part CMP-1058-00777-1, "Power MOSFET, 750 mA, 20 V, N-Channel, 3-Pin SOT-23, Pb-Free, Tape and Reel", Manufacturer="On Semiconductor", Package Type=SOT-23-3, Channel Polarity="N Channel", Ciss Typ (pF)=125, ComponentLink1Description="Manufacturer URL", ComponentLink1URL=http://www.onsemi.com/, ComponentLink2Description=Datasheet, ComponentLink2URL=http://www.onsemi.cn/pub_link/Collateral/MGSF1N02LT1-D.PDF, ComponentLink3Description="Package Specification", ComponentLink3URL=http://www.onsemi.cn/pub_link/Collateral/318-08.PDF, Configuration=Single, Coss Typ (pF)=120, Crss Typ (pF)=45, DatasheetVersion="Rev. 6", ID Max (A)=0.75, Mounting Technology="Surface Mount", PackageDescription="3-Pin Small Outline Transistor, Body 2.92 x 1.3 mm, Pitch 0.95 mm", PackageReference=SOT-23-3-318-08, PackageVersion="Rev. AP, 11/2009", Packing="Tape and Reel", PartNumber=MGSF1N02LT1G, PD Max (W)=0.4, RoHS=Pb-Free, V(BR)DSS Min (V)=20, VGS(th) Max (V)=2.4, VGS Max (V)=20
R1 R3 R5 R29 R31 R33 R34 R36 R38 R39 R41 R43 R44 R45 R47 R49 R54: library part CMP-1012-00098-1, "10K 0.1W 5% 0603 (1608 Metric)  SMD", Case-EIA=0603, Case-Metric=1608, Power="0.1 W", Tolerance="5 %", Technology=SMT
R2 R7 R9 R12 R15 R18 R27 R30 R35 R40 R46 R52: library part CMP-1012-00090-1, "4K7 0.1W 5% 0603 (1608 Metric)  SMD", Case-EIA=0603, Case-Metric=1608, Power="0.1 W", Tolerance="5 %", Technology=SMT
R4 R32 R37 R42 R48 R53: library part CMP-1012-00058-1, "220R 0.1W 5% 0603 (1608 Metric)  SMD", Case-EIA=0603, Case-Metric=1608, Power="0.1 W", Tolerance="5 %", Technology=SMT
R6 R8 R10 R11 R13 R14 R17 R19 R20 R21: "Resistor", LatestRevisionDate=17-Jul-2002, LatestRevisionNote="Re-released for DXP Platform.", PackageDescription="Axial Device, Thru-Hole; 2 Leads; 0.3 in Pin Spacing", PackageReference=AXIAL-0.3, Published=8-Jun-2000, Publisher="Altium Limited"
R16: library part CMP-1012-00115-1, "51K 0.1W 5% 0603 (1608 Metric)  SMD", Case-EIA=0603, Case-Metric=1608, Power="0.1 W", Tolerance="5 %", Technology=SMT
R22: library part CMP-1012-00061-1, "300R 0.1W 5% 0603 (1608 Metric)  SMD", Case-EIA=0603, Case-Metric=1608, Power="0.1 W", Tolerance="5 %", Technology=SMT
R23 R24: library part CMP-1015-00372-1, "60R4 0.5W 1% 1210 (3225 Metric)  SMD", Case-EIA=1210, Case-Metric=3225, Power="0.5 W", Tolerance="1 %", Technology=SMT
R25 R26 R50 R55 R56: library part CMP-1012-00062-1, "330R 0.1W 5% 0603 (1608 Metric)  SMD", Case-EIA=0603, Case-Metric=1608, Power="0.1 W", Tolerance="5 %", Technology=SMT
R28: library part CMP-1012-00085-1, "3K 0.1W 5% 0603 (1608 Metric)  SMD", Case-EIA=0603, Case-Metric=1608, Power="0.1 W", Tolerance="5 %", Technology=SMT
R51: library part CMP-1012-00074-1, "1K 0.1W 5% 0603 (1608 Metric)  SMD", Case-EIA=0603, Case-Metric=1608, Power="0.1 W", Tolerance="5 %", Technology=SMT
SW1: library part CMP-2000-05602-1, "Tactile Switch, 50 mA, 12 VDC, -20 to 85 degC, 4-Pin SMD, RoHS, Bulk", Actuator Color=N/A, Contact Rating @ Voltage=0.05@12VDCA, Dielectric Strength=500VAC, Manufacturer=TEConnectivity/AMPBrand, Maximum Contact Resistance=100mOhm, Maximum DC Voltage Rating=12V, Minimum Insulation Resistance=100MOhm, Operating Force=1.57N, Operating Temperature=-20to85C, Package Description="4-Pin Surface Mount Device, Body 6 x 6 mm, Pitch 9.1 mm", Actuator Length=1.4mm, Actuator Style=RoundButton, Base Material=N/A, Body Orientation=Straight, Contact Material=CopperAlloy, Contact Plating=Silver, Datasheet URL=https://datasheet.ciiva.com/14635/0900766b80912216-14635826.pdf, Datasheet Version=04/2007, Dimension=6x10x5.25mm, Electrical Life=100000Cycle, Family=FSMJSMA, Ground Terminal=No, Housing Material=N/A, Illumination Type=N/R, Manufacturer URL=http://www.te.com/, Maximum AC Voltage Rating=N/A, Mechanical Life=N/A, Mounting=SurfaceMount,GullWing, Mounting Technology=SurfaceMount, Package Reference=4-1437565-1, Packaging=Bulk, Part No=4-1437565-1, Pole Throw Configuration=N/A, Product Weight=N/A, RoHS=Yes, Seal Description=N/A, Seal Location=N/A, Switch Configuration=N/A, Type=N/A
SW2: library part CMP-2100-03586-1, "Ultra-Small Tactile Switch, 0.05 A, 12 V, -25 to 70 degC, 2-Pin SMD, RoHS, Tape and Reel", Case/Package=SMD/SMT, Contact Current Rating=50mA, Insulation Resistance=100MOhm, Manufacturer="Omron Electronic Components", Max Operating Temperature=70degC, Min Operating Temperature=-25degC, Operating Force=1.5N, Package Description="2-Pin Surface Mount Device, Body 3 x 2.5 mm", Package Quantity=1, Package Reference=B3U-1000, Voltage Rating (DC)=12V, Actuator Length=0.4mm, Contact Material=Silver, Current Rating=50mA, Datasheet URL=http://www.omron.com/ecb/products/pdf/en-b3u.pdf, Datasheet Version=42005.0, Depth=2.5mm, Electrical Life=200000Cycles, Height=1.2mm, Illumination Type=Illuminated, Lead Free=LeadFree, Length=4mm, Manufacturer URL=http://www.omron.com/, Max Current Rating=50mA, Mount=SurfaceMount, Orientation=Straight, Packaging=TapeandReel, REACH SVHC=Unknown, RoHSCompliant=true, Switch Travel=0.15mm, Termination=SMD/SMT, Throw Configuration=SPST, Weight=0.022g, Width=3mm
U1: library part CMP-2000-06548-1, "Quad Differential Comparator, 2 to 30 V, 0 to 70 degC, 14-pin SOIC (D14), Green (RoHS & no Sb/Br), Tube", Comparator Case Style=SOIC, Manufacturer="Texas Instruments", Operating Temperature Max=70°C, Operating Temperature Min=0°C, Package Description="14-Pin Small Outline Integrated Circuit, Body 8.65 x 3.9 mm, Pitch 1.27 mm", Package Reference=D14, Package Version="4040047-5/M, 06/2011", Supply Voltage Range=2Vto36V,±1Vto±18V, Automotive Qualification Standard=-, Comparator Type=Differential, Datasheet URL=http://www.ti.com/general/docs/lit/getliterature.tsp?genericPartNumber=LM339&fileType=pdf, Datasheet Version="Rev. T, 06/2015", IC Output Type=CMOS,MOS,TTL, Manufacturer URL=http://www.ti.com/, Mounting Technology=SurfaceMount, No. of Comparators=4, No. of Pins=14Pins, Package URL=http://www.ti.com/lit/ml/mpds177g/mpds177g.pdf, Packaging=CutTape, Product Range=-, Response Time=300ns
U2 U8 U9: library part CMP-0859-00024-3, "Single 2-Input Positive-NOR Gate, DBV0005A, LARGE T&R", F @ Nom Voltage(Max)(Mhz)=75, Generic Part Number=SN74AHC1G02, ICC @ Nom Voltage(Max)(mA)=0.01, Manufacturer="Texas Instruments", Operating Temperature Range(C)="-40 to 125,-40 to 85", Rating=Catalog, tpd @ Nom Voltage(Max)(ns)=11.4,7.5, Voltage(Nom)(V)=3.3,5, 3-State Output=No, Bits(#)=1, DatasheetVersion=SCLS342M, Gate Type=NOR, Input Type=CMOS, Logic=True, Output Drive (IOL/IOH)(Max)(mA)=50/-50, Output Type=CMOS, PackageReference=DBV0005A, Schmitt Trigger=No, Sub-Family="NAND Gate", Technology Family=AHC, VCC(Max)(V)=5.5, VCC(Min)(V)=2
U5: library part CMP-1307-00132-1, "Analog Multiplexer / Demultiplexer, 3 to 18 V, -55 to 125 degC, 24-Pin SOIC, Pb-Free, Tape and Reel", Manufacturer="On Semiconductor", ComponentLink1Description="Manufacturer URL", ComponentLink1URL=http://www.onsemi.com/, ComponentLink2Description=Datasheet, ComponentLink2URL=http://www.onsemi.com/pub_link/Collateral/MC14067B-D.PDF, ComponentLink3Description="Package Specification", ComponentLink3URL=http://www.onsemi.com/pub_link/Collateral/751E-04.PDF, DatasheetVersion="Rev. 8", Icc Max (uA)=600, Mounting Technology="Surface Mount", PackageDescription="24-Pin Small Outline Integrated Circuit, Body 15.4 x 7.5 mm, Pitch 1.27 mm", PackageReference=SOIC-24-751E-04, PackageVersion="Rev. F, 07/2012", Packing="Tape and Reel", PartNumber=MC14067BDWR2G, RoHS=TRUE, VCC Max (V)=18, VCC Min (V)=3
U6: library part CMP-0095-00577-1, "8-bit AVR Microcontroller, 128KB Flash, 4KB EEPROM, 16KB SRAM, 44-pin TQFP, Industrial Grade (-40°C to 85°C)", Code_JEDEC=MS-026-ACB, ComponentLink1Description="Manufacturer URL", ComponentLink1URL=http://www.atmel.com/, ComponentLink2Description="ATmega164A/164PA/324A/324PA/644A/644PA/1284/1284P Datasheet", ComponentLink2URL=http://www.atmel.com/dyn/resources/prod_documents/doc8272.pdf, ComponentLink3Description="ATmega164A/164PA/324A/324PA/644A/644PA/1284/1284P Summary", ComponentLink3URL=http://www.atmel.com/dyn/resources/prod_documents/8272S.pdf, DatasheetVersion="revC, Jun-2011", PackageDescription="44-Pin Plastic Thin Profile Quad Flat Pack, 10 x 10 x 1.0 mm Body, 0.8 mm Pitch (TQFP)", PackageReference=44A, PackageVersion="revC, Oct-2010"
U7: library part CMP-0244-00311-1, "Fixed Low Drop Positive Voltage Regulator, 5V, 4-Pin SOT-223, Tape and Reel", ComponentLink1Description="Manufacturer URL", ComponentLink1URL=http://www.st.com, ComponentLink2Description=Datasheet, ComponentLink2URL=http://www.st.com/internet/com/TECHNICAL_RESOURCES/TECHNICAL_LITERATURE/DATASHEET/CD00000544.pdf, DatasheetVersion=1/11/2011, PackageDescription="4-Pin SOT-223 Package, 6.5 x 3.5 mm Body, 2.3 mm Pitch, 7 mm Lead Span", PackageReference=SOT-223, PackageVersion=2010
U10 U11 U12 U13 U14 U15: library part CMP-2000-07398-1, "1 Form A Solid State Relay, 2 A, -40 to 85 degC, 6-Pin SMD, RoHS, Tape and Reel", Load Current=2A, Manufacturer=Vishay, On-State Resistance=250mOhm, Package / Case="6-SMD(0.300\",7.62mm)", Package Description="6-Pin Surface Mount Device, Body 8.6 x 6.4 mm, Pitch 2.54 mm", Standard Package=1,000, Supplier Device Package=6-SMD, Voltage - Input=1.3VDC, Voltage - Load=0~60V, Category=Relays, Circuit=SPST-NO(1FormA), Datasheet URL=https://datasheet.ciiva.com/26817/getdatasheetpartid-484357-26817425.pdf, Datasheet Version="Rev. 1.5, 04/2011", Dynamic Catalog=VO14, Family=SolidStateRelays, Manufacturer URL=http://www.vishay.com/, Minimum Quantity=SPST-NO(1FormA), Mounting Technology=SurfaceMount, Mounting Type=SurfaceMount, Online Catalog=VO14, Output Type=AC,DC, Package Reference=VO14642AABTR, Packaging=Tape&Reel(TR), Quantity Available=Tape&Reel(TR), Relay Type=Relay, Termination Style=GullWing
X2: library part CMP-0585-00002-2, "ATS-SM Series Quartz Crystal, 16 MHz, -20 to 70 degC, 11.1 x 4.83 x 4.3mm SMD, RoHS, Tape and Reel", Frequency="16 MHz", Manufacturer="CTS Corporation", Operating Temperature="-20 to 70 degC", Shunt Capacitance (C0)="7.0 pF Max", ComponentLink1Description="Manufacturer URL", ComponentLink1URL=http://www.ctscorp.com/, ComponentLink2Description=Datasheet, ComponentLink2URL=http://www.ctscorp.com/components/Datasheets/008-0309-0.pdf, ComponentLink3Description="Package Specification", ComponentLink3URL=http://www.ctscorp.com/components/Datasheets/008-0309-0.pdf, Crystal Cut=AT-Cut, DatasheetVersion="Rev. K", Drive Level (Type)="100 uW", ESR Maximum="40 Ohms", Mounting Technology="Surface Mount", Oscillation Mode="Fundamental or 3rd Overtone", PackageDescription="2-Pin SMD, Body 11.1 x 4.83 mm, Pitch 8.5 mm", PackageReference=ATS-SM-XTAL-2, Packing="Tape and Reel", PartNumber=ATS16ASM-1, RoHS=TRUE
X1: ComponentLink1Description=Datasheet, ComponentLink1URL=http://cfd.citizen.co.jp/english/prod-tech/product/pdf/datasheet_AT/HCM49_E.pdf

## Free pads (board coordinates)
  round 236.22 hole 125.98 unplated: M3(158.5,3977.18) M3(438.5,163.09) M3(2288.5,4278.6) M3(4268.5,2298.6) M3(4268.5,3977.18)

## Via types
v1: diameter 27.56, hole 11.81, Top Layer to Bottom Layer, 128 vias

## Nets (pads, with @x,y where several pads share a name; then routed paths per layer and width w, separated by ;. In a path a pad name is that pad's centre, name@x,y a point inside that pad or via, vN(x,y) a via of type N, cw(c..) or ccw(c..) an arc to the next point about the centre after c; other vN are vias at no path point)
+5: C4.2 C5.1 C6.2 C11.2 C15.2 C20.2 L2.2 P4.2 Q11.3 Q12.3 R6.2 R7.2 R10.2 R12.2 R13.1 R15.2 R17.2 R18.2 R20.2 R25.1 R26.1 R43.2 R50.1 R51.2 U1.3 U2.5 U3.14 U4.3 U5.24 U6.5 U6.17 U6.38 U7.2 U7.4 U8.1 U8.5 U9.5 | length 7255.8
  Top Layer w20: C11.2@2910,3878.6 R25.1@2975.94,3878.6 ; Q12.3@2968.86,2647.8 2969.13,2647.53 Q11.3@2969.13,2467.98 ; U8.1@3128.31,2505.38 U8.5@3228.7,2505.38 3248.5,2485.57 v1(3248.5,2473.6) ; U4.3@3153.5,4073.6 v1(3238.5,4073.6) ; R26.1@3176.06,4303.6 3211.1,4303.6 3278.97,4235.73 3296.69,4235.73 3298.5,4233.92 U3.14@3298.5,4216.2 3300.31,4214.39 3300.31,4176.79 ; v1(3248.5,4168.6) 3250.55,4168.6 3258.74,4176.79 3300.31,4176.79 ; U6.38@3357.01,3141.16 3357.01,3417.3 3388.31,3448.6 ; U6.17@3388.5,3586.04 3388.31,3585.85 3388.31,3448.6 ; v1(3468.5,2371.52) 3438.05,2401.98 3438.05,2459.88 3482.95,2504.79 3468.5,2519.23 R51.2@3468.5,2581.48 ; R10.2@3483.5,273.6 3588.5,378.6 3588.5,1033.6 ; C6.2@3688.5,4140.1 3337.01,4140.1 3300.31,4176.79 ; R7.2@3778.5,935.1 3777.28,936.32 R6.2@3777.28,1033.6 3588.5,1033.6 ; R43.2@3803.5,3357.11 3801.53,3357.11 3793.82,3349.39 3793.82,3347.42 3778.5,3332.11 U6.5@3610.94,3332.11 3504.8,3332.11 3388.31,3448.6 ; U2.5@3858.07,2073.8 3858.07,2078.72 3857.24,2079.55 3852.32,2079.55 3832.01,2099.86 ; C5.1@3863.07,2223.6 3832.01,2192.54 R18.2@3832.01,2138.6 3832.01,2099.86 ; v1(3878.5,1763.6) U1.3@3780.16,1763.6 3518.5,1763.6 ; P4.2@3913.5,2785.21 v1(3913.5,2888.6) ; R15.2@4160,1863.6 4160,1861.64 4173.94,1847.7 C4.2@4173.94,1763.6 4218.5,1719.04 ; v1(4183.5,1684.04) 4218.5,1719.04 ; R17.2@4188.5,1313.6 4253.5,1378.6 4253.5,1684.04 4218.5,1719.04 ; 3518.5,1763.6 3518.5,1943.6 R20.2@3588.5,2013.6 3588.5,2018.6 3648.62,2078.72 3757.91,2078.72 3781.53,2055.1 R12.2@3783.5,2055.1 3791.22,2062.82 3794.96,2062.82 3832.01,2099.86 ; 3518.5,1763.6 3518.5,1383.6 R13.1@3588.5,1313.6 3588.5,1033.6
  Top Layer w40: C20.2@2144.68,3929.67 2144.68,3920.89 2146.34,3919.23 U7.2@2263.34,3919.23 U7.4@2491.69,3919.23
  Bottom Layer w20: v1(3238.5,4073.6) 3238.5,4158.6 v1(3248.5,4168.6) ; v1(3248.5,2473.6) 3366.42,2473.6 v1(3468.5,2371.52) ; v1(3768.5,2888.6) v1(3913.5,2888.6) ; v1(3878.5,1763.6) 4103.94,1763.6 v1(4183.5,1684.04)
+12: C19.2 J1.26 J1.27 J1.28 J1.29 Q1.3 Q3.3 Q5.3 Q7.3 Q9.3 R1.2 R29.2 R34.2 R39.2 R45.2 U7.3 | length 8986.2
  Top Layer w20: R29.2@497.32,2599.04 503.23,2593.13 Q3.3@503.23,2478.6 ; R34.2@1059.32,2598.6 1065.23,2592.7 Q5.3@1065.23,2478.6 ; R1.2@1621.32,2596.44 1627.23,2590.53 Q1.3@1627.23,2476.01 ; R45.2@2183.32,2599.79 2189.23,2593.88 Q9.3@2189.23,2479.79 ; R39.2@2737.32,2597.23 2743.23,2591.32 Q7.3@2743.23,2476.79
  Top Layer w40: Q3.3@503.23,2478.6 563.5,2418.33 v1(563.5,2402.88) ; R34.2@1059.32,2598.6 1228.5,2598.6 v1(1233.5,2603.6) ; J1.29@1289.05,4058.6 J1.28@1407.16,4058.6 1788.5,4058.6 1956.82,3890.28 1956.82,3842.32 ; v1(1576.2,3038.6) 1576.2,3461.7 1956.82,3842.32 ; Q1.3@1627.23,2476.01 1698.5,2404.73 v1(1698.5,2273.6) ; C19.2@2142.79,3829.23 2224.15,3829.23 2224.38,3828.99 2263.03,3828.99 U7.3@2263.34,3828.68 2233.93,3828.68 2173.86,3768.6 2030.54,3768.6 1956.82,3842.32 ; Q9.3@2189.23,2479.79 2258.5,2410.51 v1(2258.5,2273.6) ; Q7.3@2743.23,2476.79 2813.5,2406.52 v1(2813.5,2276.05)
  Bottom Layer w40: v1(563.5,2402.88) 563.5,1953.6 618.5,1898.6 1187.72,1898.6 1233.5,1944.39 ; v1(1576.2,3038.6) 1233.11,2695.51 1233.5,2695.12 v1(1233.5,2603.6) 1233.5,1944.39 ; v1(1698.5,2273.6) 1698.5,2093.6 1503.5,1898.6 ; v1(2258.5,2273.6) 2258.5,2103.6 2053.5,1898.6 ; v1(2813.5,2276.05) 2813.5,2103.6 2608.5,1898.6 2053.5,1898.6 ; 1233.5,1944.39 1279.28,1898.6 1503.5,1898.6 ; 1503.5,1898.6 2053.5,1898.6
BMS_IN: J1.6 R4.1 R5.2 | length 1426.3
  Top Layer w20: J1.6@1052.83,3743.64 1052.83,2944.34 R4.1@1394.82,2602.34 1385.09,2592.61 1358.83,2592.61 1314.82,2548.6 R5.2@1314.82,2507.5
BRK_PRS_IN_RAW: J1.4 P1.3 | length 4792
  Top Layer w20: J1.4@1289.05,3743.64 1289.05,3073.93 1559.38,2803.6 2343.5,2803.6 v1(2348.5,2808.6)
  Bottom Layer w20: v1(2348.5,2808.6) 2508.5,2648.6 3023.5,2648.6 3453.5,2218.6 3453.5,1273.6 3543.5,1183.6 3858.5,1183.6 P1.3@4008.5,1033.6
CAN_CS: U3.13 U6.43 | length 1310.2
  Top Layer w20: U3.13@3348.5,4216.2 v1(3348.5,4288.6) ; v1(3393.5,3303.6) 3433.5,3263.6 3433.5,3228.6 3463.5,3198.6 3500.31,3198.6 3514.49,3184.43 U6.43@3514.49,3141.16
  Bottom Layer w20: v1(3348.5,4288.6) 3348.5,3348.6 v1(3393.5,3303.6)
CAN_N: J1.17 R24.2 U4.6 | length 2723.5
  Top Layer w20: J1.17@757.56,3842.07 611.23,3988.39 611.23,4088.6 641.23,4118.6 2593.5,4118.6 2643.38,4168.49 R24.2@2813.5,4168.49 ; R24.2@2820.64,4161.35 2865.75,4161.35 2888.5,4138.6 2888.5,4096.91 2910,4075.42 2920.39,4075.42 2922.2,4073.6 U4.6@2940.9,4073.6
CAN_P: J1.16 R23.2 U4.7 | length 2228.4
  Top Layer w20: J1.16@875.67,3842.07 935.71,3902.11 v1(1850.83,3902.11) ; v1(1998.5,4053.6) 2028.5,4083.6 2590.04,4083.6 2680.15,3993.49 R23.2@2813.5,3993.49 2845.98,3993.49 2854.68,4002.19 2854.68,4011.89 2866.4,4023.6 U4.7@2940.9,4023.6
  Bottom Layer w20: v1(1850.83,3902.11) 2002.32,4053.6 v1(1998.5,4053.6)
CAN_RX: LED2.2 U3.2 U4.4 | length 371
  Top Layer w20: U4.4@3153.5,4123.6 3172.2,4123.6 3174.01,4125.41 3174.01,4144.12 3181.97,4152.07 LED2.2@3181.97,4228.6 ; U4.4@3181.97,4125.14 3183.5,4123.6 3273.5,4123.6 3348.5,4048.6 U3.2@3348.5,4003.6
CAN_RX_LED: LED2.1 R26.2 | length 77.4
  Top Layer w20: LED2.1@3115.04,4228.6 3120.94,4234.51 R26.2@3120.94,4303.6